# Altium PCB Glucometer-I.C.- Full V1.PcbDoc
Units mm, origin at the board's own origin, x right, y up, seen from the top; angles counter-clockwise.
Board outline 53.55 x 41.75 mm, 2 copper layers (Top Layer, Bottom Layer); 28 components, 32 nets, 144 pads, 18 vias.
Unrouted connection lines stored in the file: 26.
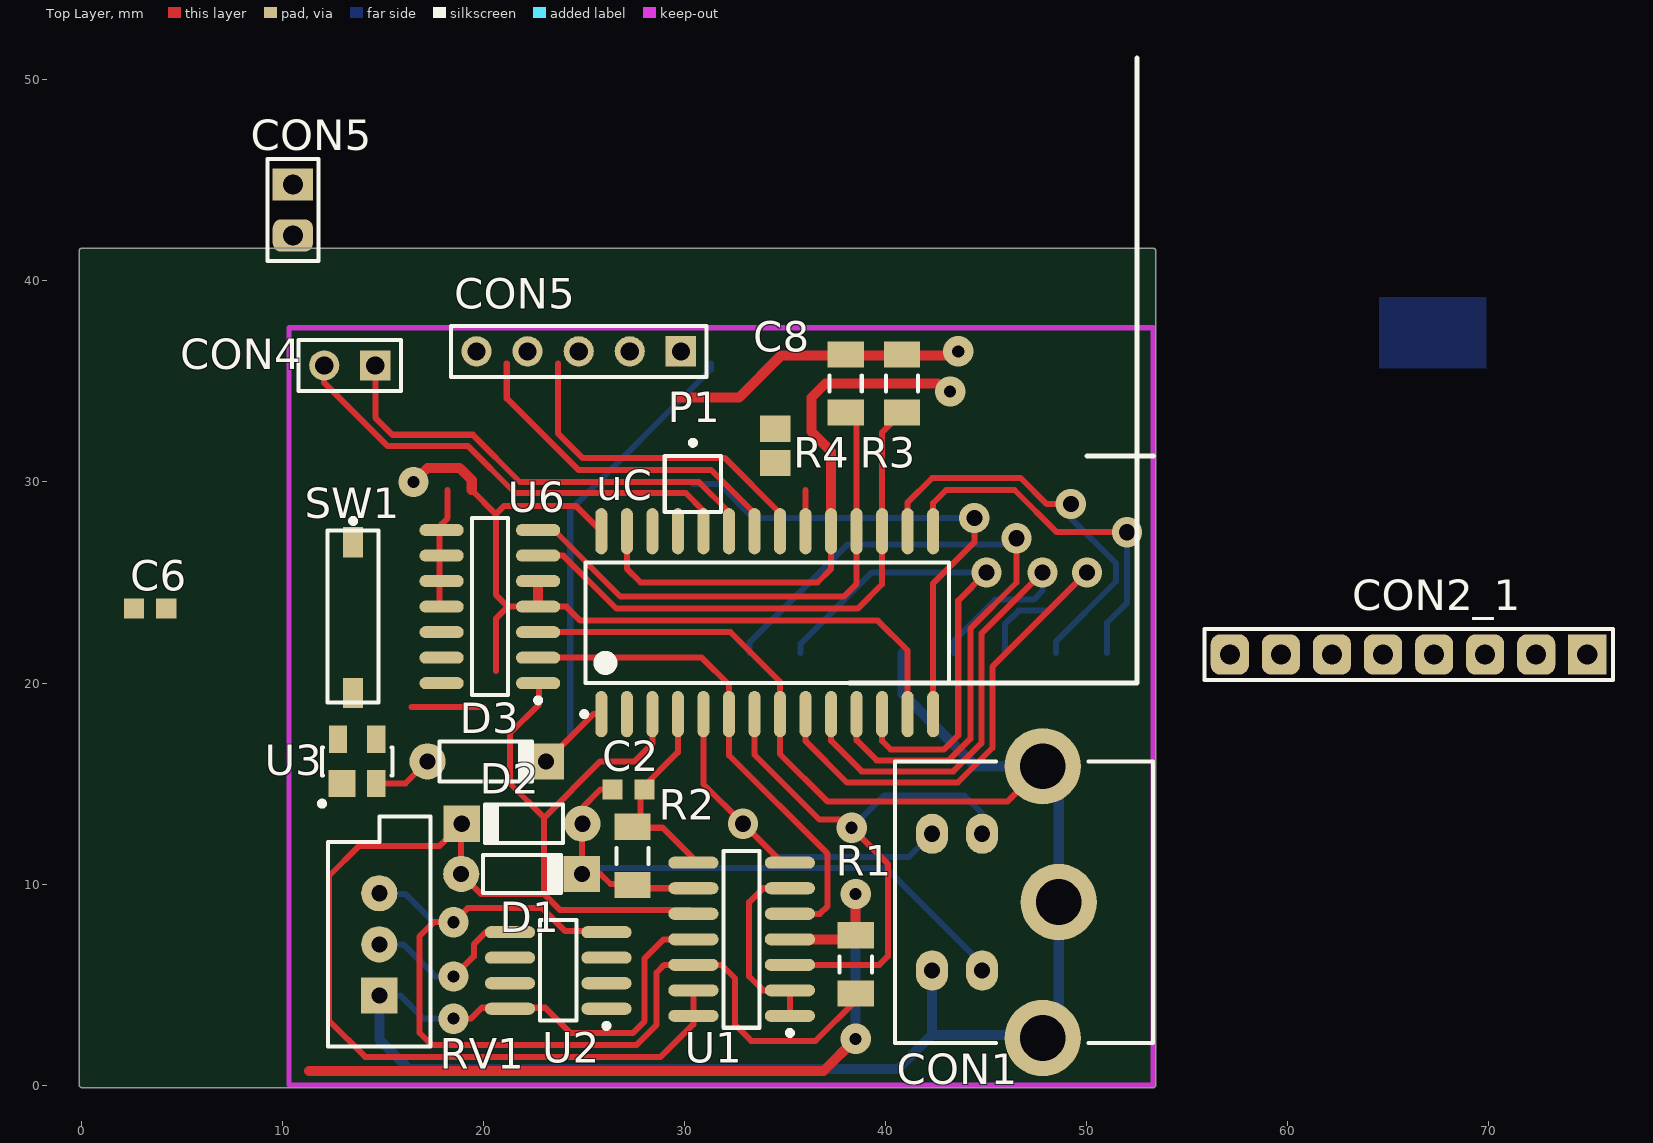
[diagram p0: Top Layer view]
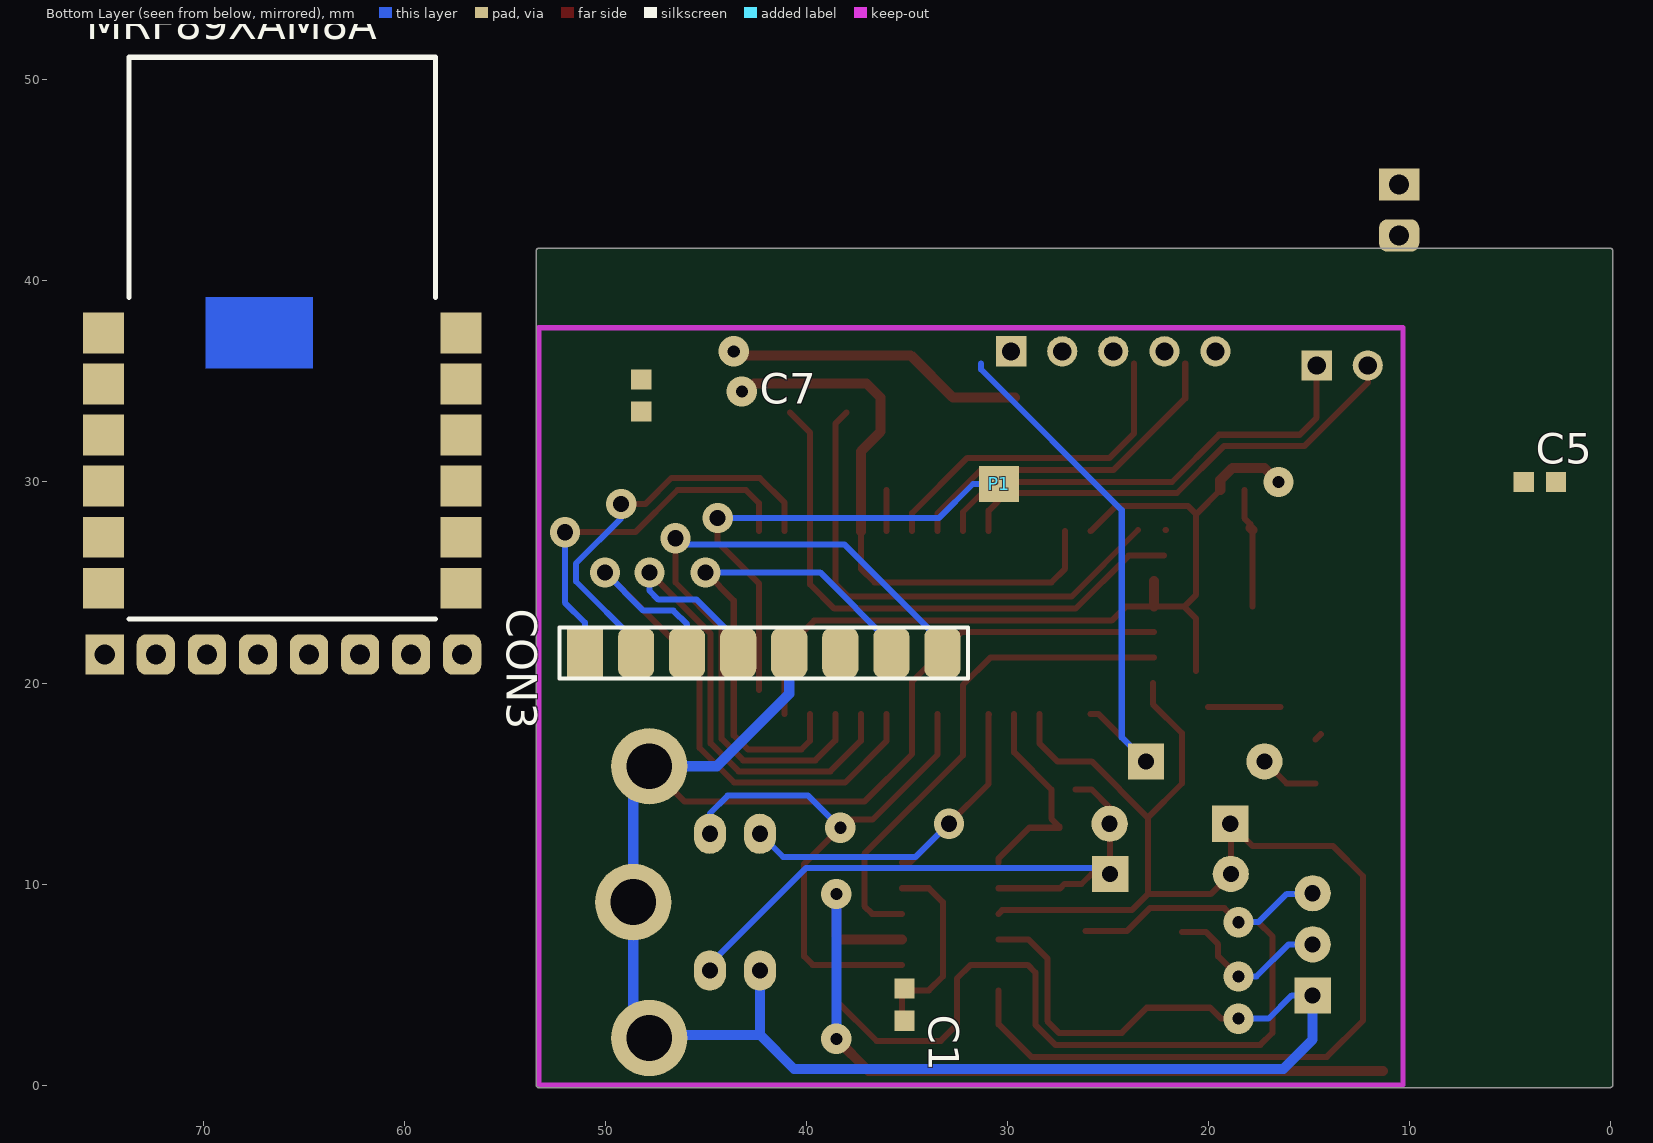
[diagram p1: Bottom Layer view, seen from below]

## Layer stack, top to bottom
Top Layer: signal copper 0.0356
Dielectric: dielectric 0.32, FR-4, Dk 4.8
Bottom Layer: signal copper 0.0356

## Board outline
-0.127,0 ccw(c0,0) 0,-0.127 53.3,-0.127 ccw(c53.3,0) 53.427,0 53.427,41.5 ccw(c53.3,41.5) 53.3,41.627 0,41.627 ccw(c0,41.5) -0.127,41.5

## Design rules (kind name [scope] priority, off if disabled: settings)
AssemblyTestPointUsage AssemblyTestPointUsage_1 [All] p2:
AssemblyTestpoint AssemblyTestpoint_1 [All] p2: testpointundercomponent=TRUE minsize=1.016 maxsize=2.54 preferedsize=1.524 minholesize=0 maxholesize=1.016 preferedholesize=0.813 testpointgrid=0.025 usegrid=TRUE gridtolerance=0 allowsidetop=TRUE allowsidebottom=TRUE
Clearance [All] p1: gap=0.25
ComponentClearance ComponentClearance_1 [All] p2: gap=0.254 collisioncheckmode=3 verticalgap=0.254 showdistances=FALSE
DiffPairsRouting DiffPairsRouting_1 [All] p2: maxlimit=0.254 minlimit=0.254 mostfreqgap=0.254 maxuncoupledlength=12.7
FabricationTestPointUsage TestPointUsage [All] p2: valid=0 allowmultiple=FALSE
FabricationTestpoint Testpoint [All] p2: side=3 testpointundercomponent=TRUE minsize=1.016 maxsize=2.54 preferedsize=1.524 minholesize=0 maxholesize=1.016 preferedholesize=0.813 testpointgrid=0.025 allowsidetop=TRUE allowsidebottom=TRUE usegrid=TRUE gridtolerance=0
FanoutControl Fanout_LCC [IsLCC] p1: bgadir=Out bgaviamode=Centered fanoutstyle=Auto fanoutdirection=Alternating viagrid=0.025 // Fanout_LCC (Default Rule)
FanoutControl Fanout_BGA [IsBGA] p2: bgadir=Out bgaviamode=Centered fanoutstyle=Auto fanoutdirection=Alternating viagrid=0.025 // Fanout_BGA (Default Rule)
FanoutControl Fanout_Default [All] p4: bgadir=Out bgaviamode=Centered fanoutstyle=Auto fanoutdirection=Alternating viagrid=0.025 // Fanout_Default (Default Rule)
FanoutControl Fanout_Small [(CompPinCount < 5)] p5: bgadir=Out bgaviamode=Centered fanoutstyle=Auto fanoutdirection=OutThenIn viagrid=0.025 // Fanout_Small (Default Rule)
FanoutControl Fanout_BGA_1 [IsBGA] p6: bgadir=Out bgaviamode=Centered fanoutstyle=Auto fanoutdirection=Alternating viagrid=0.025 // Fanout_BGA (Default Rule)
FanoutControl Fanout_LCC_1 [IsLCC] p7: bgadir=Out bgaviamode=Centered fanoutstyle=Auto fanoutdirection=Alternating viagrid=0.025 // Fanout_LCC (Default Rule)
FanoutControl Fanout_SOIC_1 [IsSOIC] p8: bgadir=Out bgaviamode=Centered fanoutstyle=Auto fanoutdirection=Alternating viagrid=0.025 // Fanout_SOIC (Default Rule)
FanoutControl Fanout_Small_1 [(CompPinCount < 5)] p9: bgadir=Out bgaviamode=Centered fanoutstyle=Auto fanoutdirection=OutThenIn viagrid=0.025 // Fanout_Small (Default Rule)
FanoutControl Fanout_Default_1 [All] p10: bgadir=Out bgaviamode=Centered fanoutstyle=Auto fanoutdirection=Alternating viagrid=0.025 // Fanout_Default (Default Rule)
Height Height_1 [All] p2: minheight=0 maxheight=25.4 prefheight=12.7
HoleSize [All] p1: absolutevalues=TRUE maxlimit=5 minlimit=0.025 maxpercent=80.000 minpercent=20.000
HoleSize HoleSize_1 [All] p2: absolutevalues=TRUE maxlimit=5 minlimit=0.025 maxpercent=80.000 minpercent=20.000
HoleToHoleClearance HoleToHoleClearance_1 [All] p2: gap=0.254 allowstackedmicrovias=TRUE
LayerPairs LayerPairs_1 [All] p2: enforce=TRUE
MinimumSolderMaskSliver MinimumSolderMaskSliver_1 [All] p2: minsoldermaskwidth=0.254
NetAntennae NetAntennae_1 [All] p2: netantennaetolerance=0
PasteMaskExpansion PasteMaskExpansion_1 [All] p2: expansion=0
PlaneClearance PlaneClearance_1 [All] p2: clearance=0.508
PolygonConnect [All] p1: connectstyle=Relief reliefconductorwidth=0.254 reliefentries=4 polygonreliefangle="90 Angle" airgapwidth=0.254
PolygonConnect PolygonConnect_1 [All] p2: connectstyle=Relief reliefconductorwidth=0.254 reliefentries=4 polygonreliefangle="90 Angle" airgapwidth=0.254
RoutingPriority RoutingPriority_1 [All] p2: routingpriority=0
RoutingTopology RoutingTopology_1 [All] p2: topology=Shortest
RoutingVias [All] p1: holewidth=0.8 width=1.5 viastyle="Through Hole" minholewidth=0.7 minwidth=1 maxholewidth=1 maxwidth=2
ShortCircuit ShortCircuit_1 [All] p2: allowed=FALSE
SilkToSilkClearance SilkToSilkClearance_1 [All] p2: silktosilkclearance=0.254
SilkToSolderMaskClearance SilkscreenOverComponentPads [IsPad] p2: minsilkscreentomaskgap=0.254 clearancetoexposedcopper=TRUE
SolderMaskExpansion [All] p1: expansion=0.102
SolderMaskExpansion SolderMaskExpansion_1 [All] p2: expansion=0.102
UnRoutedNet UnRoutedNet_1 [All] p2:
Width [All] p1: maxlimit=5 minlimit=0.25 preferedwidth=0.3 minimp=50.000000 maximp=50.000000 favimp=50.000000
23 further rules are at their usual default settings.

## Classes and differential pairs
component class "Glucometer-I.C.- Full V1": C1 C2 C5 C6 C7 C8 CON1 CON3 CON4 CON5 D1 D2 D3 P1 R1 R2 R3 R4 RV1 SW1 U1 U2 U3 U6 uC

## Components (designator, comment, footprint, x,y, rotation, side; value= is the part's Value field where it differs from the comment)
C1 "Cap2" CAPC1608N 35.1,4 r270 bottom
C2 "Cap2" CAPC1608N 27.2,14.7 r0 top
C5 "Cap" CAPC1608N 3.5,30 r0 bottom
C6 "Cap" CAPC1608N 3.4,23.7 r0 top
C7 "Cap" CAPC1608N 48.2,34.3 r90 bottom
C8 "Cap" CAPC2012N 34.5,31.8 r90 top
CON1 "" CDIN2.6-3H4A 53.3,9.1 r180 top
CON2_1 "Header 8" HDR1X8#1 74.891,21.419 r180 top (schematic designator CON2)
CON3 "Header 8" HDR1X8#2 51,21.5 r180 bottom
CON4 "Header 2" HDR1X2#1 14.6,35.8 r180 top
CON5 "Header 2" HDR1X2#2 10.5,44.8 r270 top
CON5 "Header 5" HDR1X5 29.8,36.5 r180 top
D1 "1N4148" DO-35#1 21.9,10.5 r0 top
D2 "1N4148" DO-35#2 22,13 r180 top
D3 "1N4148" DO-35#3 20.1,16.1 r0 top
MRF89XAM8A "MRF89XAM8A" MRF89XAM8A 74.948,23.19 r180 bottom
P1 "Plug" PIN1 30.4,29.9 r0 top
R1 "Res1" RESC3216N 38.5,6 r90 top
R2 "Res1" RESC3216N 27.4,11.4 r270 top
R3 "Res1" RESC3216N 40.8,34.9 r270 top
R4 "Res1" RESC3216N 38,34.9 r270 top
RV1 "RPot" VR5 14.8,7 r90 top
SW1 "SW-PB" SPST-2 13.5,23.3 r270 top
U1 "LMC6044IN" M14A_N 32.825,7.25 r180 top
U2 "LM385BM" M08A_N 23.7,5.7 r180 top
U3 "SMT811TW16F" SOT143 13.7,16.1 r0 top
U6 "AD5241" R-14_N 20.3,23.8 r180 top
uC "PIC24FJ64GA102-I/SO" SOIC-SO28_N 34.1,23 r90 top

## Footprints (in the part's own frame and the unit in brackets; to place one, negate y for a bottom-side part, rotate by r counter-clockwise, add the part's x,y. Pads: shape width x height; smd on the part's side, far side on the other; paste and mask are expansions set on the pad)
CAPC1608N [mm] "Chip Capacitor, Body 1.6x0.8mm, IPC Medium Density"
  rect 1x1 smd: 1(-0.8,0) 2(0.8,0)
  body extent -0.87,-0.48 0.87,0.48, height 0.85
CAPC2012N [mm] "Chip Capacitor, Body 2.0x1.3mm, IPC Medium Density"
  rect 1.3x1.5 smd: 1(-0.85,0) 2(0.85,0)
  body extent -1.1,-0.72 1.1,0.72, height 1.1
CDIN2.6-3H4A [mm] "Connector; Circular DIN, Thru-Hole; 4 Position; Right Angle; Pitch 2.1/2.6 mm; Body 14 x 12.84 x 13 mm (WxTxH), Shielded, Special PCB Retention"
  oval 1.6x2 hole 0.8: 1(8.51,-3.4) 2(8.51,3.4) 3(11,-3.4) 4(11,3.4)
  round 3.8 hole 2.28: MH1(5.5,-6.76) MH2(4.7,0) MH3(5.5,6.76)
  silkscreen extent 0,-7 12.84,7, body extent 0,-7 12.84,7, height 13
DO-35#1 [mm] "Diode, Axial; Body 3.8 x 1.9 mm (LxDia. max), Lead Dia. 0.53 mm (max)"
  round 1.8 hole 0.8: 1(-3.025,0)
  rect 1.8x1.8 hole 0.8: 2(2.975,0)
  silkscreen extent -1.95,-0.95 2.05,0.95
DO-35#2 [mm] "Diode, Axial; Body 3.8 x 1.9 mm (LxDia. max), Lead Dia. 0.53 mm (max)"
  round 1.8 hole 0.8: 1(-2.9,0)
  rect 1.8x1.8 hole 0.8: 2(3.1,0)
  silkscreen extent -1.95,-0.95 2.05,0.95
DO-35#3 [mm] "Diode, Axial; Body 4.6 x 2 mm (LxDia. max), Lead Dia. 0.53 mm (max)"
  round 1.8 hole 0.8: 1(-2.9,0)
  rect 1.8x1.8 hole 0.8: 2(3,0)
  silkscreen extent -2.3,-1 2.4,1
HDR1X2#1 [mm] "Connector; Header; 2 Position"
  rect 1.5x1.5 hole 0.9: 1(0,0)
  round 1.5 hole 0.9: 2(2.54,0)
  silkscreen extent -1.27,-1.27 3.81,1.27
HDR1X2#2 [mm] "Connector; Header; 2 Position"
  rect 1.6x2 hole 1: 1(0,0)
  rrect50% 1.6x2 hole 1: 2(2.54,0)
  silkscreen extent -1.27,-1.27 3.81,1.27
HDR1X5 [mm] "Connector; Header; 5 Position"
  rect 1.5x1.5 hole 0.9: 1(0,0)
  round 1.5 hole 0.9: 2(2.54,0) 3(5.08,0) 4(7.62,0) 5(10.16,0)
  silkscreen extent -1.27,-1.27 11.43,1.27
HDR1X8#1 [mm] "Connector; Header; 8 Position"
  rect 1.9x2 hole 1: 1(0,0)
  rrect50% 1.9x2 hole 1: 2(2.54,0) 3(5.08,0) 4(7.62,0) 5(10.16,0) 6(12.7,0) 7(15.24,0) 8(17.78,0)
  silkscreen extent -1.27,-1.27 19.05,1.27
HDR1X8#2 [mm] "Connector; Header; 8 Position"
  rect 1.8x2.5 smd: 1(0,0)
  rrect50% 1.8x2.5 smd: 2(2.54,0) 3(5.08,0) 4(7.62,0) 5(10.16,0) 6(12.7,0) 7(15.24,0) 8(17.78,0)
  silkscreen extent -1.27,-1.27 19.05,1.27
M08A_N [mm] "SOIC, 8-Leads, Body 4.9x3.9mm, Pitch 1.27mm, IPC Medium Density"
  oval 2.5x0.6 smd: 1(-2.4,1.905) 2(-2.4,0.635) 3(-2.4,-0.635) 4(-2.4,-1.905) 5(2.4,-1.905) 6(2.4,-0.635) 7(2.4,0.635) 8(2.4,1.905)
  silkscreen extent -2.53,-2.5 0.9,2.88, body extent -2,-2.5 2,2.5, height 1.75
M14A_N [mm] "SOIC, 14-Leads, Body 8.6x3.9mm, Pitch 1.27mm, IPC Medium Density"
  oval 2.5x0.6 smd: 1(-2.4,3.81) 2(-2.4,2.54) 3(-2.4,1.27) 4(-2.4,0) 5(-2.4,-1.27) 6(-2.4,-2.54) 7(-2.4,-3.81) 8(2.4,-3.81) 9(2.4,-2.54) 10(2.4,-1.27) 11(2.4,0) 12(2.4,1.27) 13(2.4,2.54) 14(2.4,3.81)
  silkscreen extent -2.53,-4.4 0.9,4.78, body extent -2,-4.38 2,4.38, height 1.75
MRF89XAM8A [mil] "RF Module"
  rect 80x80 smd: 1(0,560) 2(0,460) 3(0,360) 4(0,260) 5(0,160) 6(0,60) 7(700,60) 8(700,160) 9(700,260) 10(700,360) 11(700,460) 12(700,560)
  Top Layer region: 200,630 410,630 410,490 200,490
  silkscreen extent 50,0 650,1100, body extent 0,0 700,1100, height 75
PIN1 [mm] "Connector; Plug"
  rect 2x1.8 smd far side: 1(0,0)
  silkscreen extent -1.4,-1.4 1.4,2.17
R-14_N [mm] "14-Pin Narrow Body Small Outline Integrated Circuit 1.27 mm Pitch, IPC Medium Density"
  oval 2.2x0.6 smd: 1(-2.4,3.81) 2(-2.4,2.54) 3(-2.4,1.27) 4(-2.4,0) 5(-2.4,-1.27) 6(-2.4,-2.54) 7(-2.4,-3.81) 8(2.4,-3.81) 9(2.4,-2.54) 10(2.4,-1.27) 11(2.4,0) 12(2.4,1.27) 13(2.4,2.54) 14(2.4,3.81)
  silkscreen extent -2.53,-4.4 0.9,4.78, body extent -1.95,-4.33 1.95,4.33, height 1.75
RESC3216N [mm] "Chip Resistor, Body 3.2x1.6mm, IPC Medium Density"
  rect 1.3x1.8 smd: 1(-1.45,0) 2(1.45,0)
  silkscreen extent -0.4,-0.8 0.4,0.8, body extent -1.68,-0.87 1.68,0.87, height 0.71
SOIC-SO28_N [mm] "SOIC, 28-Leads, Body 17.9x7.5mm, Pitch 1.27mm, IPC Medium Density"
  oval 2.3x0.6 smd: 1(-4.55,8.255) 2(-4.55,6.985) 3(-4.55,5.715) 4(-4.55,4.445) 5(-4.55,3.175) 6(-4.55,1.905) 7(-4.55,0.635) 8(-4.55,-0.635) 9(-4.55,-1.905) 10(-4.55,-3.175) 11(-4.55,-4.445) 12(-4.55,-5.715) 13(-4.55,-6.985) 14(-4.55,-8.255) 15(4.55,-8.255) 16(4.55,-6.985) 17(4.55,-5.715) 18(4.55,-4.445) 19(4.55,-3.175) 20(4.55,-1.905) 21(4.55,-0.635) 22(4.55,0.635) 23(4.55,1.905) 24(4.55,3.175) 25(4.55,4.445) 26(4.55,5.715) 27(4.55,6.985) 28(4.55,8.255)
  silkscreen extent -4.67,-9.05 3,9.23, body extent -3.8,-9.06 3.8,9.06, height 2.65
SOT143 [mm] "SOT-143; 4 Leads; Body 3 x 2.6 mm, inc. leads (LxW max)"
  rect 1.35x1.35 smd: 1(-0.75,-1.1)
  rect 0.9x1.35 smd: 2(0.95,-1.1) 3(0.95,1.1) 4(-0.95,1.1)
  silkscreen extent -1.87,-2.22 1.75,0.7
SPST-2 [mm] "Switch; 2 Leads"
  rect 1.5x1 smd: 1(-3.7,0) 2(3.8,0)
  silkscreen extent -4.89,-1.27 4.28,1.27
VR5 [mm] "Thru-Hole; 3 Leads"
  rect 1.8x1.8 hole 0.8: 1(-2.54,0)
  round 1.8 hole 0.8: 2(0,0) 3(2.54,0)
  silkscreen extent -5.08,-2.54 6.35,2.54

## Part data
C1 C2 C5 C6 C7 C8: "Capacitor"
CON1: library part "MiniDin 4Pins - SuperVideo", "MiniDin 4 Pins"
CON2_1 CON3: "Header, 8-Pin"
CON4 CON5: "Header, 2-Pin"
CON5: "Header, 5-Pin"
D1 D2 D3: "High Conductance Fast Diode"
MRF89XAM8A: "RF Module. 868MHz Ultra Low Power Sub-Ghz Transceiver Module"
R1 R2 R3 R4: "Resistor"
RV1: "Potentiometer"
SW1: "Switch"
U1: "CMOS Quad Micropower Operational Amplifier, 14-pin MDIP"
U2: "Adjustable Micropower Voltage Reference, 8-pin Narrow SOIC"
U3: "Reset Circuit, 3.08V, Push Pull Inverted RST"
U6: "AD5241BR"
uC: "General purpose 16-bit Flash Microcontroller with nanoWatt XLP, 64KB Flash, 8KB SRAM, 28-Pin SOIC, Industrial Temperature"

## Via types
v1: diameter 1.5, hole 0.6, Top Layer to Bottom Layer, 10 vias
v2: diameter 1.5, hole 0.8, Top Layer to Bottom Layer, 8 vias

## Nets (pads, with @x,y where several pads share a name; then routed paths per layer and width w, separated by ;. In a path a pad name is that pad's centre, name@x,y a point inside that pad or via, vN(x,y) a via of type N, cw(c..) or ccw(c..) an arc to the next point about the centre after c; other vN are vias at no path point)
3.3V: C1.1 C5.2 C6.2 C7.2 CON3.6 CON5.2@27.26,36.5 R1.2 R3.1 R4.1 U1.4 U3.4 U6.4 U6.5 uC.13 uC.28 | length 103.9
  Top Layer w0.3: 16.4,18.8 20.02,18.8 ; 19.4,29.6 20.6,28.4 ; 20.6,20.6 20.6,23.2 21.2,23.8 ; uC.28 24.595,28.8 21,28.8 20.6,28.4 ; uC.13 41.085,21.615 39.6,23.1 24.8,23.1 24.1,23.8 U6.4 21.2,23.8 ; 20.6,28.4 20.6,24.4 21.2,23.8
  Top Layer w0.5: 11.3,0.7 36.9,0.7 v1(38.5,2.3) ; v1(16.5,30) 17.2,30.7 18.8,30.7 19.4,30.1 19.4,29.6 ; U6.4 U6.5 ; 29.62,34.2 32.7,34.2 34.8,36.3 43,36.3 v1@43.5,36.8 ; U1.4 R1.2@38.3,7.25 ; R1.2 v1(38.5,9.5)
  Bottom Layer w0.5: v1(38.5,2.3) v1(38.5,9.5)
  other v1: 43.6,36.5
GND: C1.2 C5.1 C6.1 C7.1 C8.1 CON1.4 CON1.MH1 CON1.MH2 CON1.MH3 CON3.5 CON5.2@10.5,42.26 CON5.3 RV1.1 SW1.1 U1.11 U2.8 U3.1 U6.3 U6.8 U6.9 U6.10 U6.11 uC.8 uC.19 uC.27 | length 151.4
  Top Layer w0.3: U6.11@17.8,23.8 U6.8@17.8,27.61 ; U6.8@17.9,27.71 17.9,27.9 18.2,28.2 18.2,29.6 ; v1(18.5,3.3) 19.355,3.3 19.9,3.845 23.055,3.845 24.3,2.6 27.425,2.6 28,3.175 28,6.3 28.95,7.25 U1.11 ; U6.3 32.27,22.53 34.735,20.065 34.735,16.465 37.1,14.1 46.04,14.1 CON1.MH1 ; uC.27 27.115,25.685 27.8,25 36.6,25 37.275,25.675 uC.19
  Top Layer w0.5: U6.8@17.8,27.61 U6.8@17.9,27.71 ; 36.29,33.34 36.3,33.35 36.3,34.2 37,34.9 42.6,34.9 v1@43.2,34.3 ; 36.3,33.33 36.3,32.5 37.275,31.525 uC.19
  Bottom Layer w0.3: RV1.1 15.84,4.46 17,3.3 v1(18.5,3.3)
  Bottom Layer w0.5: RV1.1 14.8,2.26 16.26,0.8 40.6,0.8 42.3,2.5 ; CON3.5 40.84,19.46 44.44,15.86 CON1.MH1 48.6,15.06 CON1.MH2 48.6,3.14 CON1.MH3 47.64,2.5 42.3,2.5 ; CON1.4 42.3,2.5
  other v1: 43.2,34.5
NetC2_1: C2.1 CON1.2 D1.2 D2.1 R2.2 U1.9 | length 33.6
  Top Layer w0.3: C2.1@26.6,14.7 25.8,14.7 24.9,13.8 D2.1 24.875,12.975 D1.2 25.8,10.5 26.3,10 27.15,10 27.36,9.79 U1.9
  Bottom Layer w0.3: D1.2 25.175,10.8 40,10.8 44.79,6.01 CON1.2
NetC2_2: C2.2 R2.1 U1.8 uC.4 | length 10.4
  Top Layer w0.3: R2.1@27.4,12.8 28.9,12.8 30.425,11.275 U1.8 ; R2.1 27.8,13.25 27.8,14.7 29.655,16.555 uC.4
NetC8_2: C8.2 uC.20
NetCON1_1: CON1.1 U1.3 uC.7 | length 29.1
  Top Layer w0.3: uC.7 33.465,16.435 36.7,13.2 37.9,13.2 v1(38.3,12.8) 40.1,11 40.1,6.4 39.68,5.98 U1.3
  Bottom Layer w0.3: v1(38.3,12.8) 39.9,14.4 43.9,14.4 44.79,13.51 CON1.1
NetCON1_3: CON1.3 U1.7 uC.5 | length 20
  Top Layer w0.3: uC.5@30.9,18.425 uC.5 30.925,14.975 v2(32.9,13) 34.84,11.06 U1.7
  Bottom Layer w0.3: v2(32.9,13) 34.55,11.35 41.15,11.35 CON1.3
NetCON3_1: CON3.1 uC.15 | length 18.6
  Top Layer w0.3: uC.15 42.355,28.955 43,29.6 46.4,29.6 48.5,27.5 v2(52,27.5)
  Bottom Layer w0.3: CON3.1 51,23 52,24 v2(52,27.5)
NetCON3_2: CON3.2 uC.16 | length 20.2
  Top Layer w0.3: uC.16 41.085,28.985 42.3,30.2 46.7,30.2 48,28.9 v2(49.2,28.9)
  Bottom Layer w0.3: CON3.2 48.46,22.06 51.45,25.05 51.45,25.95 49.2,28.2 v2(49.2,28.9)
NetCON3_3: CON3.3 uC.9 | length 29.5
  Top Layer w0.3: uC.9 36.005,17.105 38.06,15.05 43.583,15.05 45.3,16.767 45.3,20.8 v2(50,25.5)
  Bottom Layer w0.3: CON3.3 45.92,22.92 46.6,23.6 48.1,23.6 v2(50,25.5)
NetCON3_4: CON3.4 uC.10 | length 26.7
  Top Layer w0.3: uC.10 37.275,17.125 38.8,15.6 43.356,15.6 44.75,16.994 44.75,22.45 v2(47.8,25.5)
  Bottom Layer w0.3: CON3.4 43.38,22.08 45.45,24.15 47.35,24.15 47.8,24.6 v2(47.8,25.5)
NetCON3_7: CON3.7 uC.12 | length 25.4
  Top Layer w0.3: uC.12 39.815,17.115 40.23,16.7 42.9,16.7 43.6,17.4 43.6,24.1 v2(45,25.5)
  Bottom Layer w0.3: CON3.7 35.76,21.96 39.3,25.5 v2(45,25.5)
NetCON3_8: CON3.8 uC.11 | length 34.7
  Top Layer w0.3: uC.11 38.545,17.145 39.54,16.15 43.128,16.15 44.2,17.222 44.2,22.7 46.5,25 v2(46.5,27.2)
  Bottom Layer w0.3: CON3.8 33.22,22.02 38.1,26.9 45.9,26.9 46.2,27.2 v2(46.5,27.2)
NetCON4_1: CON4.1 uC.23 | length 23.1
  Top Layer w0.3: CON4.1 14.6,33.2 15.45,32.35 19.45,32.35 21.8,30 30.7,30 32.195,28.505 uC.23
NetCON4_2: CON4.2 uC.24 | length 23.4
  Top Layer w0.3: CON4.2 12.06,34.94 15.2,31.8 19.2,31.8 21.55,29.45 30.05,29.45 30.925,28.575 uC.24
NetCON5_1: CON5.1@29.8,36.5 D3.2 uC.1 | length 26.9
  Top Layer w0.3: v1(23.1,16.1) 25.45,18.45 uC.1
  Bottom Layer w0.3: v1(23.1,16.1) 24.3,17.3 24.3,28.6 31.3,35.6 31.3,35.9
NetCON5_4: CON5.4 uC.21 | length 17.1
  Top Layer w0.3: 23.68,35.9 23.68,32.42 24.9,31.2 31.981,31.2 34.735,28.446 uC.21
NetCON5_5: CON5.5 uC.22 | length 17.3
  Top Layer w0.3: 21.14,35.9 21.14,34.16 24.7,30.6 31.3,30.6 33.465,28.435 uC.22
NetD3_1: D3.1 U3.2 | length 3
  Top Layer w0.3: U3.2 16.1,15 D3.1
NetP1_1: P1.1 uC.14 | length 24.1
  Top Layer w0.3: 42.355,19.645 42.355,24.955 44.4,27 v2(44.4,28.2)
  Bottom Layer w0.3: P1.1 31.7,29.9 33.4,28.2 v2(44.4,28.2)
NetR1_1: R1.1 RV1.3 U1.12 U2.4 | length 48.7
  Top Layer w0.3: U2.4@26.1,7.655 24.045,7.655 22.9,8.8 19.2,8.8 v1(18.5,8.1) 17.5,8.1 16.8,7.4 16.8,2.6 17.4,2 27.603,2 28.6,2.997 28.6,5.6 28.98,5.98 U1.12 31.82,5.98 32.5,5.3 32.5,3 33.3,2.2 36.5,2.2 38.5,4.2 R1.1
  Bottom Layer w0.3: RV1.3@14.8,9.515 16.085,9.515 17.5,8.1 v1(18.5,8.1)
NetR3_2: R3.2 U6.6 uC.17 | length 28.2
  Top Layer w0.3: U6.6@22.2,26.34 23.96,26.34 26.6,23.7 38.6,23.7 39.8,24.9 39.8,27.535 uC.17 39.815,32.465 R3.2
NetR4_2: R4.2 U6.7 uC.18 | length 25.4
  Top Layer w0.3: U6.7@22.1,27.61 U6.7@22.11,27.6 ; U6.7@23.49,27.61 26.8,24.3 37.9,24.3 38.545,24.945 uC.18 38.545,32.905 R4.2
NetRV1_3: RV1.2 U2.5 | length 8.4
  Top Layer w0.3: v1(18.5,5.4) 19.5,6.4 19.5,7 20.105,7.605 U2.5
  Bottom Layer w0.3: RV1.2 16,7 17.6,5.4 v1(18.5,5.4)
NetSW1_2: SW1.2 U3.3 | length 0.4
  Top Layer w0.3: U3.3@14.4,17.45 U3.3
NetU1_1: U1.1 U1.2 U1.6 | length 9.6
  Top Layer w0.3: U1.1 U1.2 33.89,4.71 33.2,5.4 33.2,9.1 33.89,9.79 U1.6
NetU1_5: U1.5 U6.2 uC.6 | length 25.1
  Top Layer w0.3: U6.2 30.84,21.26 32.195,19.905 uC.6 32.195,16.405 37.1,11.5 37.1,8.9 36.72,8.52 U1.5
NetuC_2: uC.2
NetuC_25: uC.25
NetuC_26: uC.26
VDD: CON5.1@10.5,44.8
VGND: D1.1 D2.2 U1.10 U1.13 U1.14 U6.1 uC.3 | length 71.1
  Top Layer w0.3: U6.1@22.75,19.99 22.75,18.95 21.3,17.5 21.3,15 23,13.3 ; uC.3 28.385,16.985 27.5,16.1 25.8,16.1 23,13.3 ; U1.13 U1.14 30.425,3.025 28.8,1.4 14.1,1.4 12.3,3.2 12.3,10.4 13.8,11.9 17.8,11.9 18.875,12.975 D1.1 19.875,9.5 23,9.5 ; U1.10 30.245,8.7 23.8,8.7 23,9.5 ; 23,9.5 23,13.3
pads on no net: CON2_1.1 CON2_1.2 CON2_1.3 CON2_1.4 CON2_1.5 CON2_1.6 CON2_1.7 CON2_1.8 MRF89XAM8A.1 MRF89XAM8A.2 MRF89XAM8A.3 MRF89XAM8A.4 MRF89XAM8A.5 MRF89XAM8A.6 MRF89XAM8A.7 MRF89XAM8A.8 MRF89XAM8A.9 MRF89XAM8A.10 MRF89XAM8A.11 MRF89XAM8A.12 U2.1 U2.2 U2.3 U2.6 U2.7 U6.12 U6.13 U6.14
copper on no net: | length 2
  Top Layer w0.3: 36.005,27.55 36.005,29.595

## Keep-outs
Keep-Out Layer:
  lines w0.254: 10.3,0 53.3,0 53.3,37.67 10.3,37.67 10.3,0

## Silkscreen, mask and mechanical layers (free items; w line width, h text height)
Top Overlay:
  lines w0.254: 38.2,20 52.5,20 52.5,51.1 ; 50,31.3 53.3,31.3
Mechanical 16:
  lines w0.127: -123.675,-31.275 -118.595,-31.275 ; -123.675,22.7 -118.595,22.7 ; -123.675,76.675 -118.595,76.675 ; -53.825,-85.25 -53.825,-80.17 ; -53.825,125.57 -53.825,130.65 ; 16.025,-85.25 16.025,-80.17 ; 16.025,125.57 16.025,130.65 ; 85.875,-85.25 85.875,-80.17 ; 85.875,125.57 85.875,130.65 ; 150.645,-31.275 155.725,-31.275 ; 150.645,22.7 155.725,22.7 ; 150.645,76.675 155.725,76.675 ; -123.675,-85.25 -123.675,130.65 155.725,130.65 155.725,-85.25 -123.675,-85.25 ; -118.595,-80.17 150.645,-80.17 150.645,125.57 -118.595,125.57 -118.595,-80.17
  text "1" at -89.351,127.221 h1.78
  text "2" at -19.484,127.221 h1.78
  text "3" at 50.239,127.221 h1.78
  text "4" at 120.114,127.221 h1.78
  text "A" at -121.77,101.364 h1.78
  text "A" at 152.55,101.364 h1.78
  text "B" at 152.925,50.05 h1.78
  text "B" at -121.77,47.389 h1.78
  text "C" at -121.77,-6.586 h1.78
  text "C" at 152.55,-6.586 h1.78
  text "D" at -121.77,-60.434 h1.78
  text "D" at 152.55,-60.434 h1.78
  text "1" at -89.351,-83.599 h1.78
  text "2" at -19.484,-83.599 h1.78
  text "3" at 50.239,-83.599 h1.78
  text "4" at 120.114,-83.599 h1.78

## Dimensions
52.5,51.1 to 10.3,0 on Top Overlay
10.3,37.67 to 53.3,37.67 on Top Overlay

## Text inside footprints (layer, text, board x,y; h text height)
CON1: Mechanical 1 "PCB Edge" at 52.7,15.8 h0.25 r270